# Altium PCB KC_BaseBoard.PcbDoc
Units mil, origin at the board's own origin, x right, y up, seen from the top; angles counter-clockwise.
Board outline 9490 x 7010 mil, 2 copper layers (Top Layer, Bottom Layer); 81 components, 43 nets, 183 pads, 6 vias.
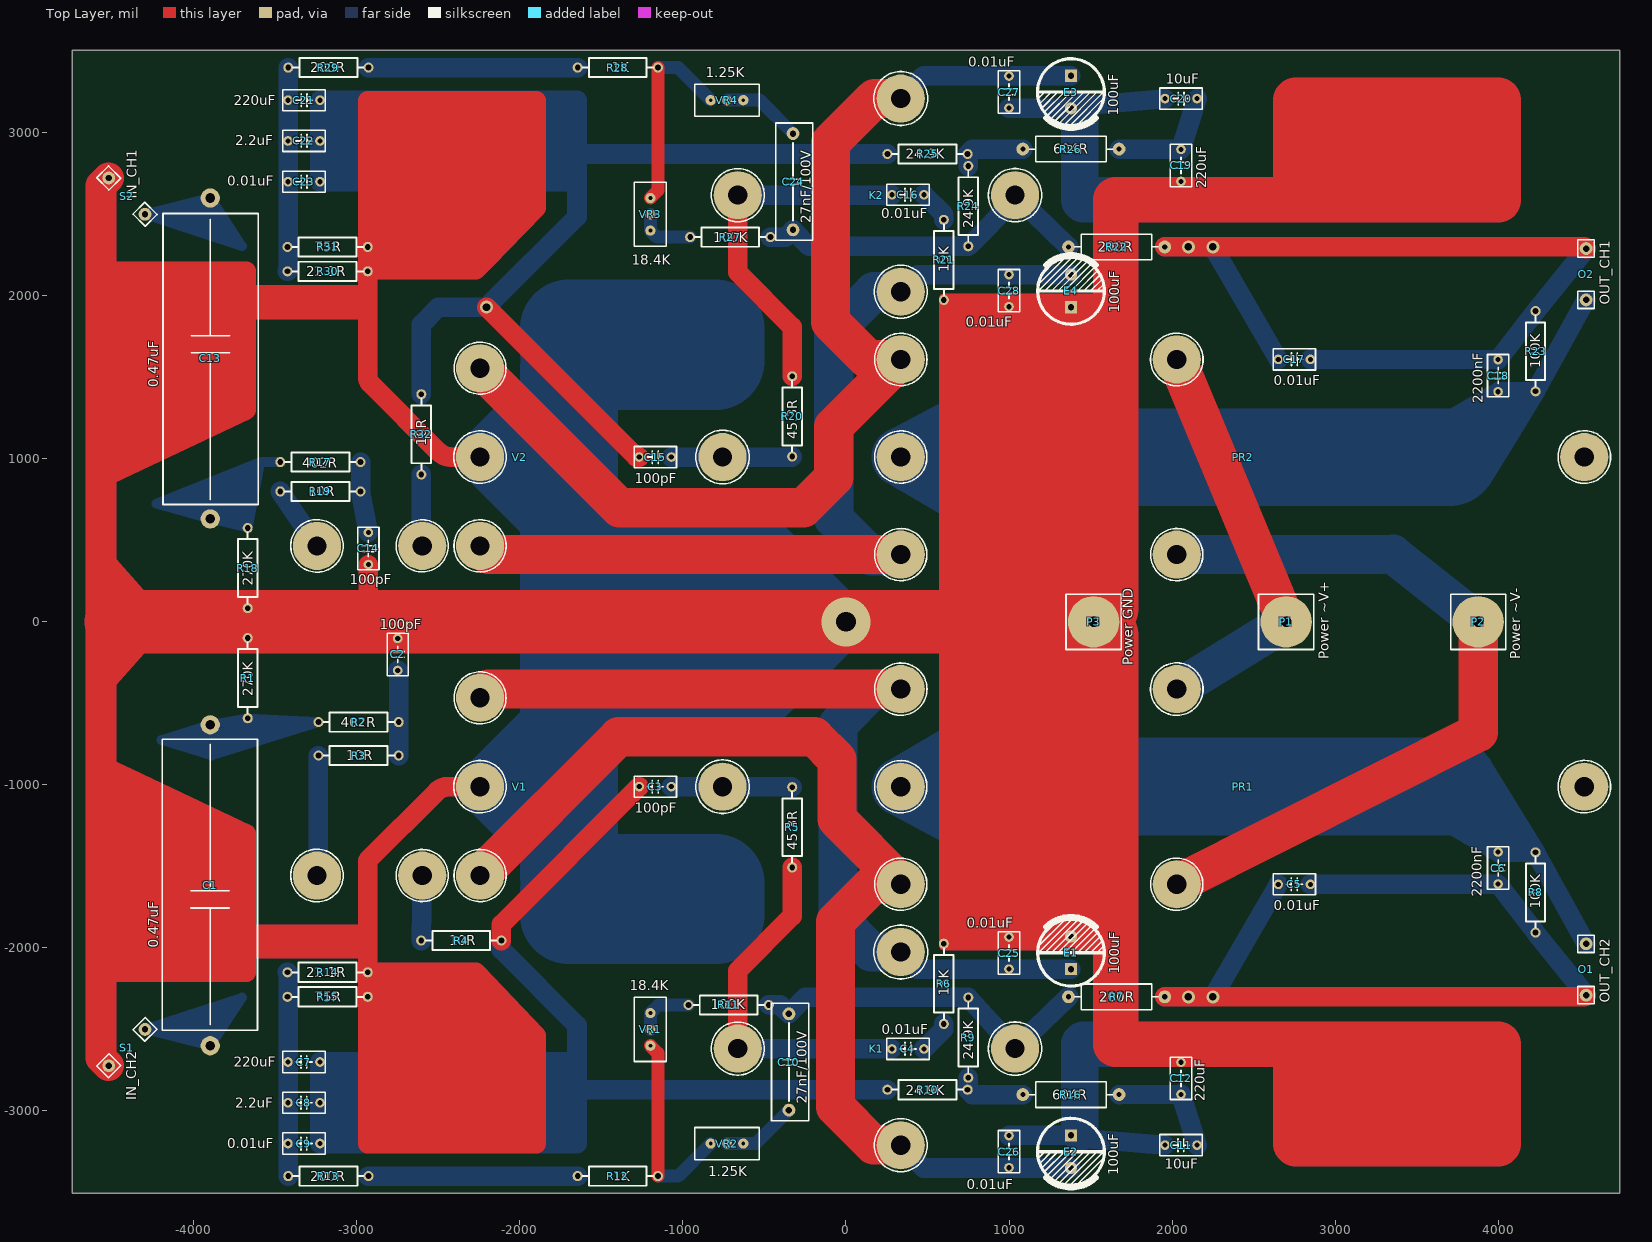
[diagram p0: Top Layer view]
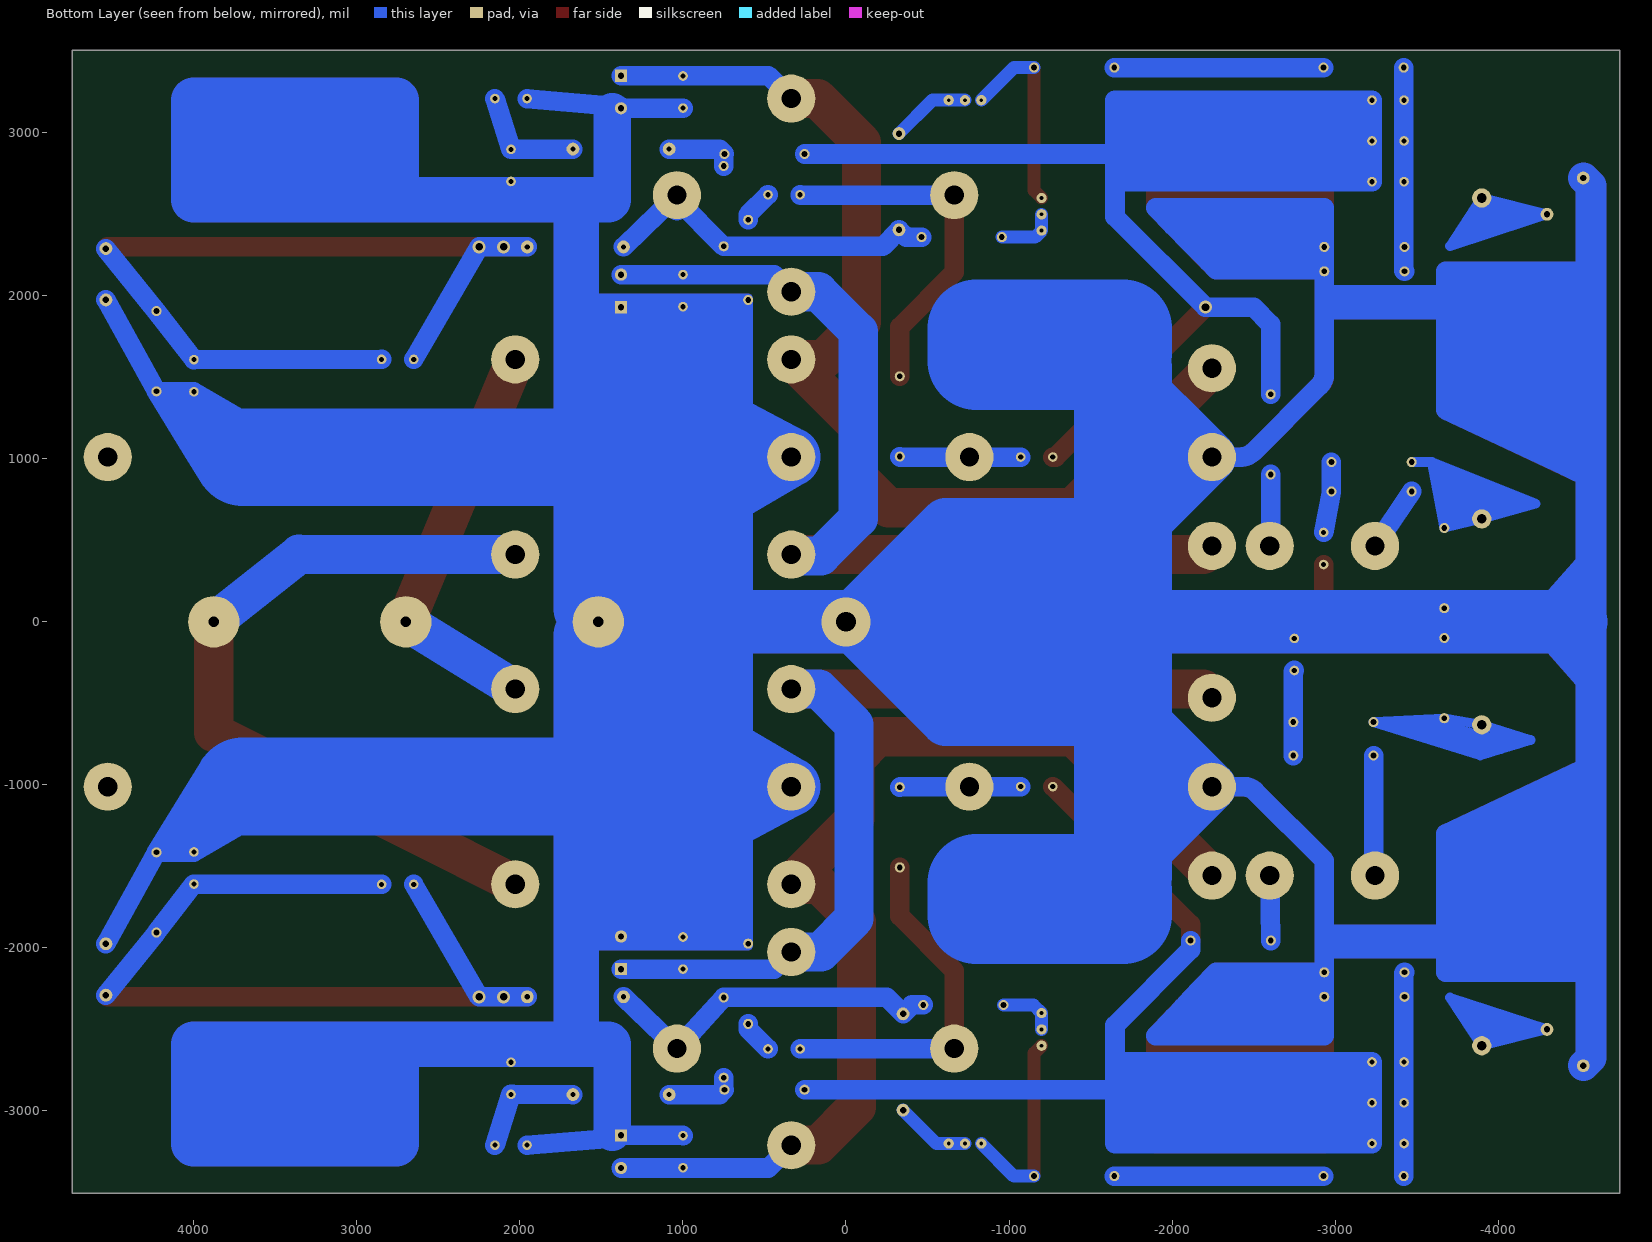
[diagram p1: Bottom Layer view, seen from below]

## Layer stack, top to bottom
Top Solder: solder mask 0.4, Solder Resist, Dk 3.5
Top Layer: signal copper 1.4
Dielectric 1: dielectric 12.6, FR-4, Dk 4.8
Bottom Layer: signal copper 1.4
Bottom Solder: solder mask 0.4, Solder Resist, Dk 3.5

## Board outline
-4745,-3505 -4745,3505 4745,3505 4745,-3505

## Design rules (kind name [scope] priority, off if disabled: settings)
Clearance [All] p1: gap=10 ignorepadtopadclearanceinfootprint=FALSE except(0: Arc-Hole Track-Hole SMDPad-Hole THPad-Hole Via-Hole Fill-Hole Poly-Hole Region-Hole Text-Hole)
PolygonConnect [All] p1: connectstyle=Relief reliefconductorwidth=10 reliefentries=4 polygonreliefangle="90 Angle" airgapwidth=10
RoomDefinition KC_BaseBoardSch [InComponentClass('KC_BaseBoardSch')] p1: confinementstyle=ConfineIn formatcopy=TRUE lockcomponents=FALSE outline 6180,-3443.15 22665,-3443.15 22665,2856.85 6180,2856.85
RoutingVias [All] p1: holewidth=28 width=50 viastyle="Through Hole" minholewidth=28 minwidth=50 maxholewidth=28 maxwidth=50
SolderMaskExpansion [All] p1: expansion=4
Width [All] p1: maxlimit=900 minlimit=10 preferedwidth=600
30 further rules are at their usual default settings.

## Components (designator, comment, footprint, x,y, rotation, side; value= is the part's Value field where it differs from the comment)
C1 "0.47uF" "CBB 50*30*30" -3900,-2600 r90 top
C2 "100pF" "CBB 6.3*6.3*5" -2750,-200 r270 top
C3 "100pF" "CBB 6.3*6.3*5" -1170,-1011 r0 top
C4 "0.01uF" "CBB 6.3*6.3*5" 380,-2620 r0 top
C5 "0.01uF" "CBB 6.3*6.3*5" 2750,-1610 r0 top
C6 "2200nF" "CBB 6.3*6.3*5" 4000,-1510 r270 top
C7 "220uF" "CBB 6.3*6.3*5" -3325,-2700 r0 top
C8 "2.2uF" "CBB 6.3*6.3*5" -3325,-2950 r0 top
C9 "0.01uF" "CBB 6.3*6.3*5" -3325,-3200 r0 top
C10 "27nF/100V" "CBB 15*18*11" -350,-2700 r90 top
C11 "10uF" "CBB 6.3*6.3*5" 2055,-3210 r0 top
C12 "220uF" "CBB 6.3*6.3*5" 2055,-2800 r270 top
C13 "0.47uF" "CBB 50*30*30" -3900,2600 r270 top
C14 "100pF" "CBB 6.3*6.3*5" -2930,450 r90 top
C15 "100pF" "CBB 6.3*6.3*5" -1170,1011 r0 top
C16 "0.01uF" "CBB 6.3*6.3*5" 380,2620 r0 top
C17 "0.01uF" "CBB 6.3*6.3*5" 2750,1610 r180 top
C18 "2200nF" "CBB 6.3*6.3*5" 4000,1510 r270 top
C19 "220uF" "CBB 6.3*6.3*5" 2055,2800 r270 top
C20 "10uF" "CBB 6.3*6.3*5" 2055,3210 r180 top
C21 "220uF" "CBB 6.3*6.3*5" -3325,3200 r180 top
C22 "2.2uF" "CBB 6.3*6.3*5" -3325,2950 r180 top
C23 "0.01uF" "CBB 6.3*6.3*5" -3325,2700 r180 top
C24 "27nF/100V" "CBB 15*18*11" -325,2700 r90 top
C25 "0.01uF" "CBB 6.3*6.3*5" 1000,-2031.57 r90 top
C26 "0.01uF" "CBB 6.3*6.3*5" 1000,-3250 r90 top
C27 "0.01uF" "CBB 6.3*6.3*5" 1000,3250 r270 top
C28 "0.01uF" "CBB 6.3*6.3*5" 1000,2031.57 r270 top
E1 "100uF" "CAP 5.0*10*20" 1380,-2030 r90 top
E2 "100uF" "CAP 5.0*10*20" 1380,-3250 r270 top
E3 "100uF" "CAP 5.0*10*20" 1380,3250 r270 top
E4 "100uF" "CAP 5.0*10*20" 1380,2030 r90 top
K1 "KCBuff" KCBUFF -663.9,-2617.7 r0 top
K2 "KCBuff" KCBUFF -663.9,2617.7 r0 top
O1 "OUT_CH2" SIGNAL_TERMINAL 4540,-2289.96 r90 top
O2 "OUT_CH1" SIGNAL_TERMINAL 4540,2289.96 r270 top
P1 "Power ~V+" SINGLEPIN 2700,0 r0 top
P2 "Power ~V-" SINGLEPIN 3878,0 r0 top
P3 "Power GND" SINGLEPIN 1519,0 r0 top
PR1 "MainBoardPowerRegulator" KC_MBPOWERREG 336,-1011 r0 top
PR2 "MainBoardPowerRegulator" KC_MBPOWERREG 336,1011 r0 top
R1 "270K" "RS 1/2W" -3670,-345 r270 top
R2 "402R" "RS 1/2W" -2990,-615 r0 top
R3 "10R" "RS 1/2W" -2990,-820 r0 top
R4 "10R" "RS 1/2W" -2360,-1955 r180 top
R5 "45.3R" "RS 1/2W" -330,-1260 r90 top
R6 "15K" "RS 1/2W" 600,-2220 r270 top
R7 "200R" "RS 1W" 1660,-2300 r0 top
R8 "100K" "RS 1/2W" 4230,-1660 r270 top
R9 "24.9K" "RS 1/2W" 750,-2550 r270 top
R10 "24.9K" "RS 1/2W" 500,-2870 r180 top
R11 "100K" "RS 1/2W" -720,-2350 r180 top
R12 "1K" "RS 1/2W" -1400,-3400 r0 top
R13 "200R" "RS 1/2W" -3175,-3400 r180 top
R14 "22.1R" "RS 1/2W" -3180,-2150 r180 top
R15 "75R" "RS 1/2W" -3180,-2300 r180 top
R16 "604R" "RS 1W" 1380,-2900 r180 top
R17 "402R" "RS 1/2W" -3223.94,980 r0 top
R18 "270K" "RS 1/2W" -3670,330 r90 top
R19 "10R" "RS 1/2W" -3223.94,800 r180 top
R20 "45.3R" "RS 1/2W" -330,1260 r90 top
R21 "15K" "RS 1/2W" 600,2220 r270 top
R22 "200R" "RS 1W" 1660,2300 r180 top
R23 "100K" "RS 1/2W" 4230,1660 r270 top
R24 "24.9K" "RS 1/2W" 750,2550 r270 top
R25 "24.9K" "RS 1/2W" 500,2870 r0 top
R26 "604R" "RS 1W" 1380,2900 r180 top
R27 "100K" "RS 1/2W" -710,2360 r180 top
R28 "1K" "RS 1/2W" -1400,3400 r0 top
R29 "200R" "RS 1/2W" -3175,3400 r180 top
R30 "22.1R" "RS 1/2W" -3180,2150 r180 top
R31 "75R" "RS 1/2W" -3180,2300 r180 top
R32 "10R" "RS 1/2W" -2605,1150 r270 top
S1 "IN_CH2" SIGNAL_TERMINAL -4300,-2500 r225 top
S2 "IN_CH1" SIGNAL_TERMINAL -4300,2500 r135 top
V1 "KCInputVas" KCIN_VAS -3245,-1556 r0 top
V2 "KCInputVas" KCIN_VAS -3245,466 r0 top
VR1 "18.4K" "RS 1/2W-VR" -1200,-2500 r270 top
VR2 "1.25K" "RS 1/2W-VR" -730,-3200 r180 top
VR3 "18.4K" "RS 1/2W-VR" -1200,2500 r90 top
VR4 "1.25K" "RS 1/2W-VR" -730,3200 r180 top

## Footprints (in the part's own frame and the unit in brackets; to place one, negate y for a bottom-side part, rotate by r counter-clockwise, add the part's x,y. Pads: shape width x height; smd on the part's side, far side on the other; paste and mask are expansions set on the pad)
"CAP 5.0*10*20" [mm] "脚距5mm直径10mm高度20mm"
  rect 1.9x1.9 hole 1: 1(-2.54,0)
  round 1.9 hole 1: 2(2.54,0)
  silkscreen extent -5.19,-5.21 5.69,5.19, body extent -5,-5 5.01,5, height 20.03
"CBB 6.3*6.3*5" [mm] "脚距5mm高6.3mm厚3mm"
  round 1.5 hole 0.8: 1(-2.5,0) 2(2.5,0)
  silkscreen extent -3.3,-1.65 3.3,1.65, body extent -3.15,-1.5 3.15,1.5, height 6.8
"CBB 15*18*11" [mm] "脚距15mm高18mm厚11mm"
  round 2 hole 1: 1(-7.5,0) 2(7.5,0)
  silkscreen extent -9.15,-3.07 9.14,2.72, body extent -9.01,-2.92 8.99,2.58, height 11.53
"CBB 50*30*30" [mm] "大型耦合电容 脚距50mm 宽30mm"
  round 3 hole 1.5: 1(0,0) 2(50,0)
  silkscreen extent 2.41,-7.37 47.75,7.49, body extent 2.41,-7.49 47.75,7.62, height 30.3
KC_MBPOWERREG [mm]
  round 7.5 hole 3: 1(0,15.2) 2(0,-15.2) 3(43,15.2) 4(43,-15.2) 5(0,0) 6(106.5,0)
  silkscreen extent -4.07,-19.27 110.59,19.29
KCBUFF [mm]
  round 7.5 hole 3: 1(0,0) 2(43.199,0) 3(25.397,15.05) 4(25.397,-15.05)
  silkscreen extent -4.13,-19.18 47.35,19.25
KCIN_VAS [mm]
  round 7.5 hole 3: 1(0,0) 2(16.396,0) 3(25.4,27.686) 4(25.4,0) 5(25.4,13.843) 6(63.182,13.843)
  silkscreen extent -4.09,-4.09 67.36,31.73
"RS 1/2W" [mil] "直插色环电阻，脚距12.5mm，直径3mm"
  round 62 hole 35.43: 1(-246.06,0) 2(246.06,0)
  silkscreen extent -217,-59 217,59, body extent -256,-59 256,59, height 122
"RS 1/2W-VR" [mm] "直插3脚顶调可调电阻，脚距2.54mm，长10mm*宽5mm*高10mm"
  round 1.6 hole 0.6: 1(-2.54,0) 2(2.54,0) 3(0,0)
  silkscreen extent -5,-2.5 5,2.5
"RS 1W" [mm] "直插色环电阻，脚距15mm，直径4mm"
  round 2 hole 0.8: 1(-7.5,0) 2(7.5,0)
  silkscreen extent -6.5,-2 6.5,2, body extent -7.8,-2.01 7.8,2.01, height 4.11
SIGNAL_TERMINAL [mm]
  round 2 hole 1: 1(0,0) 2(8,0)
  silkscreen extent -1.35,-1.3 9.35,1.3
SINGLEPIN [mm] "Single Pin For Power Wire or GND"
  round 8 hole 1.6: 1(0,0)
  silkscreen extent -4.3,-4.3 4.3,4.3

## Part data
C1 C2 C3 C4 C5 C6 C7 C8 C9 C10 C11 C12 C13 C14 C15 C16 C17 C18 C19 C20 C21 C22 C23 C24 C25 C26 C27 C28: library part C-CBB, "CBB电容", BOM名称=CBB电容, 学习资源=www.ooocke.com, 版权归属=源创客
E1 E2 E3 E4: library part C-CAP, "直插电解电容", BOM名称=直插电解电容, 学习资源=www.ooocke.com, 版权归属=源创客
K1 K2: "King Cello Buffer Stage"
O1 O2: library part Signal_Out, "Signal Out"
P1 P2: library part PowerPin, "Power Pin"
P3: library part PowerPin
PR1 PR2: "King Cello Main Board Power Regulator"
R1 R2 R3 R4 R5 R6 R7 R8 R9 R10 R11 R12 R13 R14 R15 R16 R17 R18 R19 R20 R21 R22 R23 R24 R25 R26 R27 R28 R29 R30 R31 R32: library part R-CRR, "直插色环电阻", BOM名称=色环电阻, 学习资源=www.ooocke.com, 版权归属=源创客
S1 S2: library part Signal_In, "Signal In"
V1 V2: "King Cello Input Stage and VAS"
VR1 VR2 VR3 VR4: library part VR-W, "直插可调电阻-顶调"

## Via types
v1: diameter 80, hole 47, Top Layer to Bottom Layer, 4 vias
v2: diameter 80, hole 48, Top Layer to Bottom Layer, 1 vias
v3: diameter 300, hole 120, Top Layer to Bottom Layer, 1 vias

## Nets (pads, with @x,y where several pads share a name; then routed paths per layer and width w, separated by ;. In a path a pad name is that pad's centre, name@x,y a point inside that pad or via, vN(x,y) a via of type N, cw(c..) or ccw(c..) an arc to the next point about the centre after c; other vN are vias at no path point)
GND: C2.1 C6.1 C11.1 C12.1 C14.1 C18.2 C19.2 C20.2 C25.2 C26.2 C27.2 C28.2 E1.2 E2.1 E3.2 E4.1 O1.2 O2.2 P3.1 PR1.5 PR2.5 R1.1 R6.1 R8.1 R14.1 R15.1 R18.1 R21.2 R23.2 R30.1 R31.1 S1.2 S2.2 V1.5 V2.5 | length 222976.1
  Top Layer w60: 600,1795 R21.2 600,1985 785,1985 ; 765,-1820 600,-1820 R6.1 600,-1985 775,-1985
  Top Layer w120: -4570,-2150 -3680,-2150 -3680,-1960 -3680,-1300 -4404.64,-958.04 ; -4570,-2045 -3730,-2040 ; -4570,-1945 -3735,-1945 ; -4570,-1825 -3730,-1825 ; -4570,-1710 -3735,-1710 ; -4570,-1595 -3715,-1595 ; -4570,-1480 -3710,-1480 ; -4570,-1360 -3710,-1360 ; -4570,-1250 -3835,-1250 ; -4570,-1150 -4080,-1150 ; -4570,-880 -4404.64,-958.04 ; -4570,880 -3680,1300 -3680,1960 -3680,2150 -4570,2150 ; -4570,1170 -3995,1175 ; -4570,1285 -3790,1285 ; -4570,1390 -3735,1390 ; -4570,1490 -3715,1490 ; -4570,1605 -3695,1605 ; -4570,1720 -3725,1720 ; -4570,1835 -3710,1835 ; -4570,1940 -3745,1940 ; -4570,2045 -3740,2045 ; -4400,1010 -4570,1075 -4205,1080 ; -4270,-1070 -4570,-1050 -4404.64,-958.04 ; -2935,0 -2930,5 C14.1 ; R14.1 -2270,-2150 -1900,-2540 -1900,-3200 -2935,-3200 -2935,-3100 ; -2920,2335 -2109.47,2324.87 ; -2890,2240 -2200.81,2231.06 ; V1.5 -2439.58,-1011 ccw(c-2439.58,-1111) -2510.29,-1040.29 -2935,-1465 -2935,-2235 ; V2.5 -2424.58,1011 cw(c-2424.58,1111) -2495.29,1040.29 -2920,1465 cw(c-2886.35,1498.65) -2933.94,1498.65 R30.1 R30.1@-2933.94,2160 ; -2235,-2235 -2935,-2235 ; -2160,-2300 -2933.93,-2297.44 R15.1@-2935,-2297.43 ; -2110,-2395 -2935,-2395 ; -1975,-2495 -2935,-2495 ; -1950,-2690 -2935,-2690 ; -1940,-3100 -2935,-3100 ; -1925,-2905 -2935,-2905 ; -1925,-2800 -2935,-2800 ; -1925,-2590 -2935,-2590 ; -1920,-3000 -2935,-3000 ; -2935,-3100 -2935,-3000 ; -2935,-3000 -2935,-2905 ; -2935,-2905 -2935,-2800 ; -2935,-2800 -2935,-2690 ; -2935,-2690 -2935,-2590 ; -2935,-2590 -2935,-2495 ; -2935,-2495 -2935,-2395 ; -2935,-2395 -2935,-2302.57 cw(c-2931.37,-2302.57) R15.1 cw(c-2931.37,-2297.43) R15.1@-2935,-2297.43 ; R15.1@-2935,-2297.43 -2935,-2235 ; R30.1@-2933.94,2160 R31.1 -2933.94,2430 ; R30.1@-2933.94,2160 -2270,2160 -2200.81,2231.06 ; -2933.94,2430 -2933.94,2535 ; -2933.94,2430 -2008.25,2428.82 ; -2933.94,2535 -2933.94,2645 ; -2933.94,2535 -1900,2540 ; -2933.94,2645 -2933.94,2750 ; -2933.94,2645 -1900,2645 ; -2933.94,2750 -2933.94,2855 ; -2933.94,2750 -1900,2750 ; -2933.94,2855 -2933.94,2975 ; -2933.94,2855 -1900,2855 ; -2933.94,2975 -2933.94,3085 ; -2933.94,2975 -1900,2975 ; -2933.94,3085 -2933.94,3197.43 -1900,3197.43 -1900,3085 ; -2933.94,3085 -1900,3085 ; -2200.81,2231.06 -2109.47,2324.87 ; -2109.47,2324.87 -2008.25,2428.82 ; -2008.25,2428.82 -1900,2540 ; -1900,2540 -1900,2645 ; -1900,2645 -1900,2750 ; -1900,2750 -1900,2855 ; -1900,2855 -1900,2975 ; -1900,2975 -1900,3085
  Top Layer w190: S1.2 -4570,-2675.42 -4570,-2150 -4570,-2045 -4570,-1945 -4570,-1825 -4570,-1710 -4570,-1595 -4570,-1480 -4570,-1360 -4570,-1250 -4570,-1150 -4570,-1050 -4570,-880 -4570,-350 ; S2.2 -4570,2675.42 -4570,2150 -4570,2045 -4570,1940 -4570,1835 -4570,1720 -4570,1605 -4570,1490 -4570,1390 -4570,1285 -4570,1170 -4570,1075 -4570,880 -4570,350 ; -4293.51,0 -4277.71,-20 ; -3256,0 -3276,-20 -4277.71,-20 ; -4570,-350 -4570,-20 ; -4570,-350 -4277.71,-20 ; -4570,-20 -4570,350 ; -4570,-20 -4277.71,-20 ; -4570,350 -4260,0 -4277.71,-20
  Top Layer w210: -3680,-1960 -2980,-1960 ; -3680,1960 -2990,1960
  Top Layer w280: 2760,-3005 2760,-2810 ; 2760,-3005 2760,-3200 4000,-3200 4000,-3005 ; 2760,-3005 4000,-3005 ; 2760,-2810 2760,-2590 ; 2760,-2810 4000,-2810 ; 2760,-2590 4000,-2590 4000,-2810 ; 2760,-2590 1655,-2590 1655,-136 1600,-81 P3.1 1600,81 1655,136 1655,2590 2760,2590 ; 2760,2590 2760,2775 ; 2760,2590 4000,2590 4000,2775 ; 2760,2775 2760,2980 ; 2760,2775 4000,2775 ; 2760,2980 2760,3200 4000,3200 4000,2980 ; 2760,2980 4000,2980 ; 4000,-3005 4000,-2810 ; 4000,2775 4000,2980
  Top Layer w320: 1530,1820 1600,1750
  Top Layer w390: -4475,0 -4293.51,0 -4260,0 -3256,0 -2935,0 v3(0,0) 765,0 ; P3.1 1180,0 ; 1530,1820 1220,1820 ; P3.1@1600,-81 1600,-1750 1530,-1820 1255,-1820 ; P3.1@1600,81 1600,1750 ; 765,0 992.5,0 ; 765,0 765,-1820 1030,-1820 ; 765,0 765,1820 992.5,1820 ; 992.5,0 992.5,1820 ; 992.5,0 1180,0 ; 992.5,0 992.5,-1782.5 1030,-1820 ; 992.5,1820 1220,1820 ; 1030,-1820 1255,-1820 ; 1180,0 1220,40 1220,1820 ; 1180,0 1255,-75 1255,-1820
  Bottom Layer w60: 765,-1820 600,-1820 R6.1 600,-1985 815,-1985 ; 765,1820 600,1820 R21.2 600,1985 775,1985
  Bottom Layer w120: -4570,-2020 -3765,-2020 ; -4570,-1900 -3755,-1900 -3715,-1780 ; -4570,-1780 -3715,-1780 ; -4570,-1665 -3715,-1665 ; -4570,-1550 -3740,-1550 ; -4570,-1435 -3735,-1435 ; -4570,-1305 -3735,-1305 ; -4570,-1195 -3945,-1195 ; -4570,-1080 -4380,-1080 ; -4570,-985 -4380,-1080 ; -4570,-880 -3680,-1300 -3680,-1365 ; -4570,880 -4411.11,954.98 ; -4570,1165 -4030,1165 ; -4570,1265 -3835,1265 ; -4570,1365 -3705,1365 ; -4570,1480 -3710,1480 ; -4570,1595 -3705,1595 ; -4570,1700 -3700,1700 ; -4570,1820 -3700,1820 ; -4570,1935 -3745,1935 ; -4570,2035 -3740,2035 ; -4570,2160 -4560,2150 -3680,2150 -3680,1960 -3680,1300 -4411.11,954.98 ; -4555,-2065 -4570,-2150 -3680,-2150 -3680,-2080 ; -4545,-2075 -3680,-2080 ; -4505,-1365 -3680,-1365 ; -4230,1065 -4570,1065 -4411.11,954.98 ; -4185,-1080 -4380,-1080 ; R14.1 -2270,-2150 -2176.54,-2248.51 ; V1.5 -2439.58,-1011 ccw(c-2439.58,-1111) -2510.29,-1040.29 -2935,-1465 -2935,-2245 ; V2.5 -2424.58,1011 cw(c-2424.58,1111) -2495.29,1040.29 -2904.65,1449.65 cw(c-2833.94,1520.36) -2933.94,1520.36 R30.1 R30.1@-2933.94,2160 ; C26.2 1001.57,-3150 E2.1 ; C27.2 1001.57,3150 E3.2 ; E3.2@1380,3160 1383.44,3160.3 1384.53,3160.39 1388.41,3160.73 C20.2 ; E2.1@1395,-3165 C11.1 ; 3700,-1010 3945,-1305 ; 3715,-1245 C6.1 ; 3715,1245 C18.2 ; 3825,1205 C18.2 ; 3900,-875 4019.93,-1070.86 ; 3900,875 4009.16,1053.27 ; 3900,1160 4000,1236.95 ; 3915,-1205 4000,-1261.38 ; O1.2 R8.1 ; O2.2 R23.2 ; -3715,-1780 -3680,-1835 ; -3680,-2080 -3680,-1960 -3680,-1835 ; -3680,-1835 -3680,-1365 ; -2935,-2245 -2935,-2297.43 ccw(c-2931.37,-2297.43) R15.1 -2933.94,-2375 ; -2935,-2245 -2180.05,-2245 -2176.54,-2248.51 ; -2933.94,-2455 -2904.3,-2425.36 -2008.76,-2425.36 ; -2933.94,-2455 -2933.94,-2540 -1900,-2540 -2008.76,-2425.36 ; -2933.94,-2455 -2933.94,-2375 ; -2933.94,-2375 -2868.72,-2309.78 -2118.42,-2309.78 ; -2933.94,-2375 -2078.05,-2375 -2067.01,-2363.96 ; R30.1@-2933.94,2160 -2933.94,2240 ; R30.1@-2933.94,2160 -2270,2160 -2222.65,2208.63 ; -2933.94,2240 R31.1 ; -2933.94,2240 -2254.02,2240 -2222.65,2208.63 ; R31.1 -2933.94,2440 ; R31.1 -2914.13,2319.81 -2114.4,2319.81 ; -2933.94,2440 -2014.23,2440 -2005.69,2431.46 ; -2933.94,2440 -2933.94,2540 -1900,2540 -2005.69,2431.46 ; -2222.65,2208.63 -2114.4,2319.81 ; -2176.54,-2248.51 -2118.42,-2309.78 ; -2118.42,-2309.78 -2067.01,-2363.96 ; -2114.4,2319.81 -2005.69,2431.46 ; -2067.01,-2363.96 -2008.76,-2425.36 ; C6.1 R8.1 ; C6.1 4000,-1261.38 ; 4000,-1261.38 R8.1 ; 4000,-1261.38 4000,-1090.79 4019.93,-1070.86 ; 4000,1236.95 R23.2 ; 4000,1236.95 4000,1062.43 4009.16,1053.27 ; 4000,1236.95 C18.2 ; C18.2 R23.2 ; 4009.16,1053.27 R23.2 ; 4019.93,-1070.86 R8.1
  Bottom Layer w190: S1.2 -4570,-2675.42 -4570,-2150 -4570,-2020 -4570,-1900 -4570,-1780 -4570,-1665 -4570,-1550 -4570,-1435 -4570,-1305 -4570,-1195 -4570,-1080 -4570,-985 -4570,-880 -4570,-350 ; S2.2 -4570,2675.42 -4570,2160 -4570,2035 -4570,1935 -4570,1820 -4570,1700 -4570,1595 -4570,1480 -4570,1365 -4570,1265 -4570,1165 -4570,1065 -4570,880 -4570,350 ; -4570,-350 -4570,350 ; -4570,-350 -4260,0 -4570,350
  Bottom Layer w210: -3680,-1960 -2990,-1960 ; -3680,1960 -2995,1960
  Bottom Layer w230: 1435,-3130 1435,-2615 1460,-2590 ; 1435,3130 1435,2615 1460,2590
  Bottom Layer w280: 1460,-2590 1655,-2590 ; 1460,2590 1655,2590 ; 1655,-2590 1655,-1010 1655,-136 1600,-81 P3.1 1600,81 1655,136 1655,1010 1655,2590 ; 1655,-2590 2760,-2590 ; 1655,2590 2760,2590 ; 2760,-3000 2760,-2800 ; 2760,-3000 2760,-3200 4000,-3200 4000,-3000 ; 2760,-3000 4000,-3000 ; 2760,-2800 2760,-2590 ; 2760,-2800 4000,-2800 ; 2760,-2590 4000,-2590 4000,-2800 ; 2760,2590 2760,2790 ; 2760,2590 4000,2590 4000,2790 ; 2760,2790 2760,2970 ; 2760,2790 4000,2790 ; 2760,2970 2760,3200 4000,3200 4000,2970 ; 2760,2970 4000,2970 ; 4000,-3000 4000,-2800 ; 4000,2790 4000,2970
  Bottom Layer w300: -1700,-1650 -1700,-1556 V1.5 ; -1700,-1015 -1704,-1011 V1.5 ; -1700,1005 -1706,1011 V2.5 ; -1700,1650 -1700,1556 V2.5 ; -440,-320 -1415,-320 -1700,-605 -1695,-610 ; V1.5 -1844,-610 -1700,-610 -1695,-610 ; V2.5 -1849,615 -1700,615 -1695,610 ; -1695,-610 -610,-610 v3(0,0) -330,330 ; -1695,610 -610,610 -330,330 ; -1695,610 -1415,330 -330,330
  Bottom Layer w360: 765,-1240 PR1.5 765,-760 ; 765,760 PR2.5 765,1240
  Bottom Layer w390: -4475,0 -4260,0 -1700,0 v3(0,0) 765,0 ; P3.1 1315,0 ; P3.1@1600,-81 1600,-1010 1600,-1745 1525,-1820 1315,-1820 ; P3.1@1600,81 1600,1010 1600,1745 1525,1820 ; 765,0 1085,0 ; 765,0 765,760 765,1240 765,1820 995,1820 ; 765,0 765,-760 765,-1240 765,-1820 1055,-1820 ; 995,1820 1085,1730 1085,0 ; 995,1820 1525,1820 ; 1055,-1820 1085,-1790 1085,0 ; 1055,-1820 1315,-1820 ; 1085,0 1315,0 ; 1315,-1820 1315,0 ; 1315,0 1315,1610 1525,1820
  Bottom Layer w600: -1700,-1650 -1700,-1800 -800,-1800 -800,-1600 -1585,-1600 ; -1700,-1556 -1700,-1015 -1700,-610 -1700,-605 -1700,0 -1700,615 -1700,1005 -1700,1556 ; -1700,1650 -1700,1800 -800,1800 -800,1600 -1535,1600 ; 1600,-1010 1655,-1010 3700,-1010 ; 1600,1010 1655,1010 3700,1010
NetC1_1: C1.1 S1.1 | length 2945.6
  Bottom Layer w60: -3980,-2485 -3795,-2408.79 ; -3960,-2565 -3945.83,-2551.59 ; -3870,-2490 -3880.41,-2489.65 ; -3790,-2390 S1.1 ; -3737.82,-2354.66 -3795,-2408.79 ; S1.1 -3705,-2305 C1.1 S1.1 ; -3945.83,-2551.59 -4165,-2480 -3880.41,-2489.65 ; -3945.83,-2551.59 -3880.41,-2489.65 ; -3880.41,-2489.65 -3795,-2408.79
NetC1_2: C1.2 R1.2 R2.1 | length 3741.7
  Bottom Layer w60: -3570,-620 -3658.64,-640.4 -3885.91,-692.71 -4125.47,-747.84 ; -3450,-610 -4019.68,-780.26 ; -3390,-615 -3944.11,-803.42 ; -4125.47,-747.84 -4019.68,-780.26 ; -4125.47,-747.84 -4200,-725 C1.2 R1.2 R2.1 -3890,-820 -3944.11,-803.42 ; -4019.68,-780.26 -3944.11,-803.42
NetC2_2: C2.2 R2.2 R3.2 | length 524.1
  Bottom Layer w120: C2.2 -2743.94,-304.49 R2.2 R3.2
NetC3_1: C3.1 C7.2 C8.2 C9.2 R4.1 R10.2 | length 14594.8
  Top Layer w120: R4.1 -2113.94,-1856.51 C3.1
  Bottom Layer w120: R4.1 -2113.94,-2011.06 -1650,-2475 -1650,-2700 ; R10.2 -1650,-2870 ; -3226.57,-3095 -1650,-3095 ; -3226.57,-3095 C9.2 -1650,-3200 -1650,-3095 ; -3226.57,-3095 -3226.57,-3000 ; -3226.57,-3000 C8.2 -3226.57,-2900 ; -3226.57,-3000 -1650,-3000 ; -3226.57,-2900 -3226.57,-2805 ; -3226.57,-2900 -1650,-2900 ; -3226.57,-2805 -1650,-2805 ; -3226.57,-2805 C7.2 -1650,-2700 ; -1650,-3095 -1650,-3000 ; -1650,-3000 -1650,-2900 ; -1650,-2900 -1650,-2870 ; -1650,-2870 -1650,-2805 ; -1650,-2805 -1650,-2700
NetC3_2: C3.2 R5.2 V1.6 | length 742.8
  Bottom Layer w120: C3.2 V1.6 -332.94,-1011 R5.2
NetC4_1: C4.1 K1.1 R5.1 | length 2196.4
  Top Layer w120: K1.1 -663.9,-2138.9 -330,-1805 R5.1
  Bottom Layer w120: K1.1 279.27,-2617.7 C4.1
NetC4_2: C4.2 R6.2 | length 204.3
  Bottom Layer w120: C4.2 600,-2498.43 R6.2
NetC5_1: C5.1 C5.2 C6.2 O1.1 R7.2 R8.2 | length 5703.1
  Top Layer w120: R7.2 v1(2100,-2300) v1(2250,-2300) 4529.96,-2300 O1.1
  Bottom Layer w120: R7.2 v1(2100,-2300) v1(2250,-2300) C5.1 ; C5.2 C6.2 R8.2 O1.1
NetC7_1: C7.1 C8.1 C9.1 R13.2 R14.2 R15.2 | length 1252.1
  Bottom Layer w120: R14.2 -3421.06,-2155 -3421.06,-2700 R13.2
NetC10_1: C10.1 VR2.1 VR2.3 | length 464.8
  Bottom Layer w80: VR2.3 VR2.1 -554.72,-3200 C10.1
NetC10_2: C10.2 K1.2 R7.1 R9.1 R11.1 | length 2169.4
  Bottom Layer w120: R11.1 -404.72,-2350 C10.2 ; C10.2@-350,-2403.15 -250.79,-2303.94 R9.1 K1.2 R7.1
NetC11_2: C11.2 C12.2 R16.1 | length 706.5
  Bottom Layer w120: R16.1@1675.27,-2899.82 2045,-2898.46 C12.2 C11.2
NetC13_1: C13.1 S2.1 | length 2932.6
  Bottom Layer w60: -4125,2495 -3821.93,2418.28 ; -4045,2510 -3870,2467.9 ; -3935,2535 -3870,2467.9 ; -3895,2540 S2.1 ; S2.1 -4188.68,2463.52 ; S2.1 C13.1 -3705,2305 -4188.68,2463.52 ; -4188.68,2463.52 -3780,2375 -3821.93,2418.28 ; -3870,2467.9 -3821.93,2418.28
NetC13_2: C13.2 R17.1 R18.2 | length 6021.4
  Bottom Layer w60: -4135,750 C13.2 ; -4015,790 -4010.69,784.06 ; C13.2@-3870,660 C13.2 ; -3855,710 -3864.16,708.94 ; -3825,745 -3849.54,740.54 ; -3825,790 -3826.86,789.54 ; -3805,845 -4010.69,784.06 ; -3785,880 -3826.86,789.54 ; -3715,900 C13.2 ; -3685,640 C13.2 ; -3670,710 C13.2 ; -3665,675 C13.2 ; -3660,755 C13.2 ; -3645,795 C13.2 ; -3630,860 C13.2 ; R17.1 -3595,980 ; -4038.41,737.09 -4005.73,712.15 ; -4038.41,737.09 -4075,765 -4010.69,784.06 ; -4038.41,737.09 -3986.03,750.07 ; -4010.69,784.06 -3986.03,750.07 ; -4005.73,712.15 -3983.44,695.15 ; -4005.73,712.15 -3964.02,719.73 ; -3986.03,750.07 -3964.02,719.73 ; -3986.03,750.07 -3826.86,789.54 ; -3983.44,695.15 C13.2 ; -3983.44,695.15 -3949.07,699.13 ; -3964.02,719.73 -3949.07,699.13 ; -3964.02,719.73 -3849.54,740.54 ; -3949.07,699.13 C13.2 ; -3949.07,699.13 -3908.36,703.83 -3864.16,708.94 ; C13.2 -3864.16,708.94 ; C13.2 -3595,980 ; C13.2 R18.2 -3595,980 ; C13.2 -4230,725 -3595,980 ; -3864.16,708.94 -3849.54,740.54 ; -3849.54,740.54 -3826.86,789.54
NetC14_2: C14.2 R17.2 R19.1 | length 436.1
  Bottom Layer w120: R17.2 R19.1 C14.2
NetC15_1: C15.1 C21.1 C22.1 C23.1 R25.1 R32.1 | length 15552.9
  Top Layer w120: v2(-2205,1930) -1286,1011 C15.1
  Bottom Layer w120: R32.1 -2605,1825 -2500,1930 v2(-2205,1930) -1650,2485 -1650,2700 ; R25.1 -1650,2870 ; -3226.57,2790 -1650,2790 ; -3226.57,2790 C23.1 -1650,2700 ; -3226.57,2790 -3226.57,2870 ; -3226.57,2870 C22.1 C22.1@-3226.57,2965 ; -3226.57,2870 -1650,2870 ; C22.1@-3226.57,2965 -3226.57,3080 ; C22.1@-3226.57,2965 -1650,2965 ; -3226.57,3080 -1650,3080 ; -3226.57,3080 C21.1 -1650,3200 -1650,3080 ; -1650,2700 -1650,2790 ; -1650,2790 -1650,2870 ; -1650,2870 -1650,2965 ; -1650,2965 -1650,3080
NetC15_2: C15.2 R20.1 V2.6 | length 742.8
  Bottom Layer w120: C15.2 V2.6 -332.94,1011 R20.1
NetC16_1: C16.1 K2.1 R20.2 | length 2196.4
  Top Layer w120: K2.1 -663.9,2143.9 -330,1810 R20.2
  Bottom Layer w120: K2.1 279.27,2617.7 C16.1
NetC16_2: C16.2 R21.1 | length 204.3
  Bottom Layer w120: C16.2 600,2498.43 R21.1
NetC17_1: C17.1 C17.2 C18.1 O2.1 R22.1 R23.1 | length 5703.1
  Top Layer w120: R22.1 v1(2100,2300) v1(2250,2300) 4529.96,2300 O2.1
  Bottom Layer w120: R22.1 v1(2100,2300) v1(2250,2300) C17.2 ; C17.1 C18.1 4230,1905 4230.52,1905.64 O2.1
NetC19_1: C19.1 C20.1 R26.1 | length 706.5
  Bottom Layer w120: R26.1@1675.27,2899.82 C19.1 C20.1
NetC21_2: C21.2 C22.2 C23.2 R29.2 R30.2 R31.2 | length 1252.1
  Bottom Layer w120: R30.2 -3421.06,2155 -3421.06,2700 R29.2
NetC24_1: C24.1 K2.2 R22.2 R24.2 R27.1 | length 2232.7
  Bottom Layer w120: R27.1 -369.72,2360 C24.1 ; C24.1@-325,2403.15 -225.79,2303.94 R24.2 K2.2@1036.85,2590.79 ; K2.2@1036.85,2520.79 K2.2@1036.85,2590.79 ; R22.2 K2.2 K2.2@1036.85,2590.79
NetC24_2: C24.2 VR4.1 VR4.3 | length 489.8
  Bottom Layer w80: VR4.3 VR4.1 -529.72,3200 C24.2
NetC25_1: C25.1 E1.1 K1.3 PR1.1 V1.3 | length 5827.6
  Top Layer w240: V1.3 -2191.57,-412.57 PR1.1
  Bottom Layer w120: K1.3 440.8,-2130 E1.1
  Bottom Layer w240: K1.3 155.2,-2025.2 -50,-1820 -50,-630 167.43,-412.57 PR1.1
NetC26_1: C26.1 E2.2 K1.4 PR1.2 V1.4 | length 6758.7
  Top Layer w210: PR1.2 PR1.2@336,-1601
  Top Layer w240: V1.4 -1394,-705 -195,-705 -55,-845 -55,-1210 PR1.2@336,-1601 ; K1.4 170.2,-3210.2 -65,-2975 -65,-1840 165.57,-1609.43 PR1.2
  Bottom Layer w120: K1.4 475.8,-3350 E2.2
NetC27_1: C27.1 E3.1 K2.3 PR2.1 V2.3 | length 6767.2
  Top Layer w240: V2.3 -1389,700 -260,700 -75,885 -75,1198.43 PR2.1 135.57,1609.43 -95,1840 -95,2940 175.2,3210.2 K2.3
  Bottom Layer w120: K2.3 475.8,3350 E3.1
NetC28_1: C28.1 E4.2 K2.4 PR2.2 V2.4 | length 5857.5
  Top Layer w240: V2.4 -2191.57,412.57 PR2.2
  Bottom Layer w120: K2.4 440.8,2130 E4.2
  Bottom Layer w240: PR2.2 328.43,405 155,405 -75,635 -75,1780 170.2,2025.2 K2.4
NetP1_1: P1.1 PR1.3 PR2.3 | length 2531.5
  Top Layer w240: PR2.3 P1.1
  Bottom Layer w240: PR1.3 P1.1
NetP2_1: P2.1 PR1.4 PR2.4 | length 4742.2
  Top Layer w240: PR1.4 3878,-678 P2.1
  Bottom Layer w240: PR2.4 3355,415 P2.1
NetR3_1: R3.1 V1.1 | length 739.7
  Bottom Layer w120: V1.1 -3236.06,-1547.06 R3.1
NetR4_2: R4.2 V1.2 | length 399.1
  Bottom Layer w120: R4.2 V1.2
NetR9_2: R9.2 R10.1 R16.2 | length 426.7
  Bottom Layer w120: R9.2 750,-2866.06 R10.1 776.06,-2900 R16.2
NetR11_2: R11.2 VR1.1 VR1.3 | length 354.6
  Bottom Layer w80: VR1.3 VR1.1 -1150,-2350 R11.2
NetR12_1: R12.1 R13.1 | length 1282.9
  Bottom Layer w120: R13.1 R12.1
NetR12_2: R12.2 VR1.2 VR2.2 | length 1225.9
  Top Layer w80: VR1.2 -1153.94,-2646.06 R12.2
  Bottom Layer w80: R12.2 -1030,-3400 VR2.2
NetR19_2: R19.2 V2.1 | length 402.7
  Bottom Layer w120: R19.2 V2.1
NetR24_1: R24.1 R25.2 R26.2 | length 426.7
  Bottom Layer w120: R24.1 750,2866.06 R25.2 776.06,2900 R26.2
NetR27_2: R27.2 VR3.1 VR3.3 | length 360.5
  Bottom Layer w80: VR3.3 VR3.1 -1160,2360 R27.2
NetR28_1: R28.1 R29.1 | length 1282.9
  Bottom Layer w120: R29.1 R28.1
NetR28_2: R28.2 VR3.2 VR4.2 | length 1225.9
  Top Layer w80: VR3.2 -1153.94,2646.06 R28.2
  Bottom Layer w80: R28.2 -1030,3400 VR4.2
NetR32_2: R32.2 V2.2 | length 439.4
  Bottom Layer w120: R32.2 -2605,479.28 ccw(c-2586.22,479.28) V2.2
pads on no net: PR1.6 PR2.6

## Silkscreen, mask and mechanical layers (free items; w line width, h text height)
Drill Drawing:
  the board outline again, w10